# Altium PCB PCBVrBikeV1.PcbDoc
Units mm, origin at the board's own origin, x right, y up, seen from the top; angles counter-clockwise.
Board outline 150 x 40 mm, 2 copper layers (Top Layer, Bottom Layer); 9 components, 16 nets, 82 pads, 0 vias.
Unrouted connection lines stored in the file: 1.
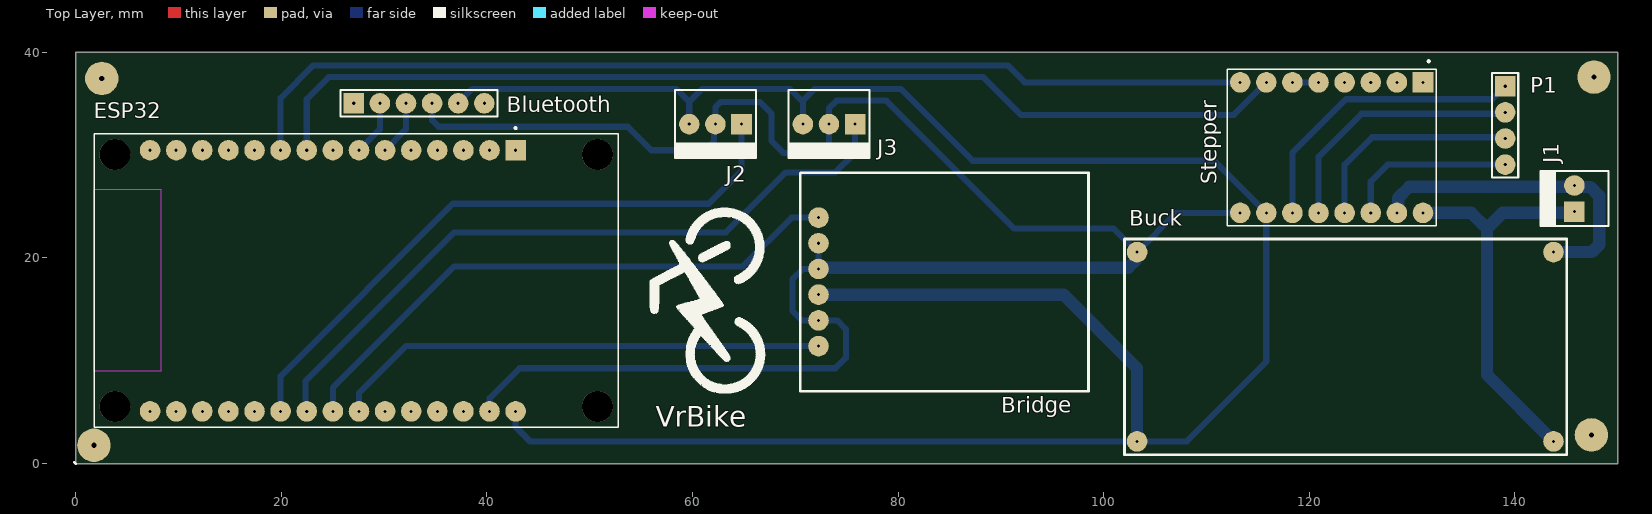
[diagram p0: Top Layer view]
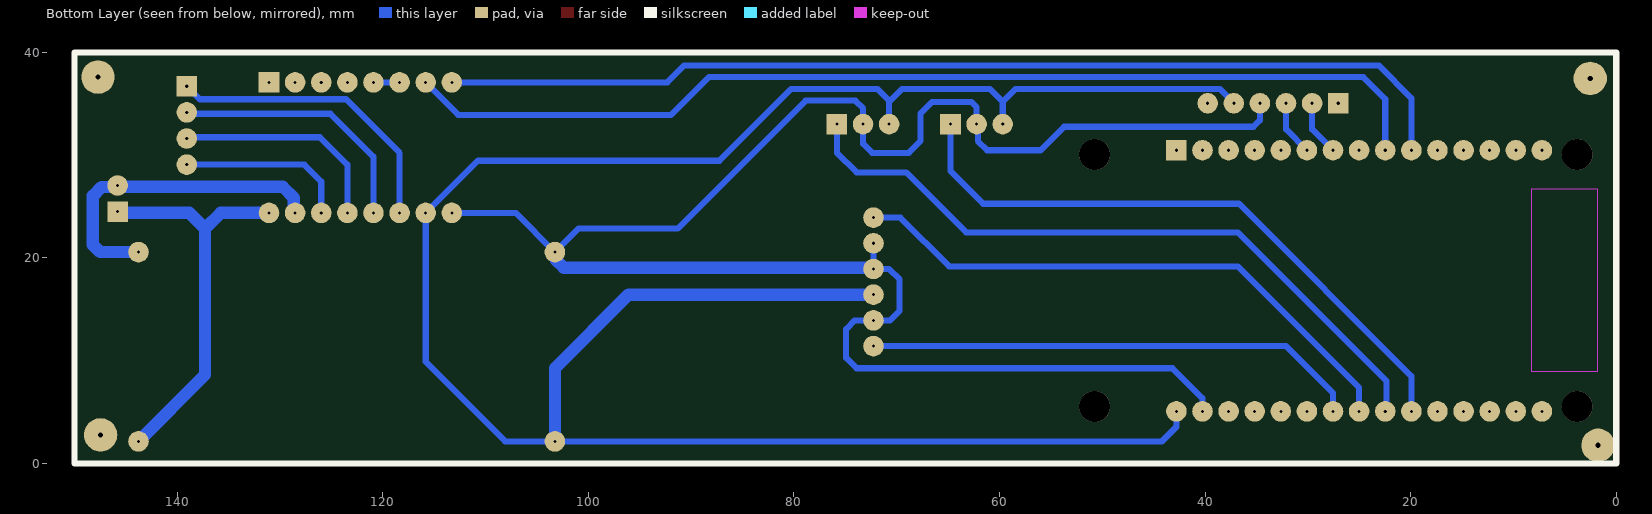
[diagram p1: Bottom Layer view, seen from below]

## Layer stack, top to bottom
Top Solder: solder mask 0.0102, Solder Resist, Dk 3.5
Top Layer: signal copper 0.0356
Dielectric 1: dielectric 0.32, FR-4, Dk 4.8
Bottom Layer: signal copper 0.0356
Bottom Solder: solder mask 0.0102, Solder Resist, Dk 3.5

## Board outline
0,0 0,40 150,40 150,0

## Design rules (kind name [scope] priority, off if disabled: settings)
Clearance [All] p1: gap=0.3 ignorepadtopadclearanceinfootprint=FALSE except(0: Arc-Hole Track-Hole SMDPad-Hole THPad-Hole Via-Hole Fill-Hole Poly-Hole Region-Hole Text-Hole)
DiffPairsRouting [All] p1: maxlimit=0.254 minlimit=0.254 mostfreqgap=0.254 substack1={94633C89-C73B-4681-96DD-338DADF11B5A} toplayer_{94633c89-c73b-4681-96dd-338dadf11b5a}_minwidth=0.381 toplayer_{94633c89-c73b-4681-96dd-338dadf11b5a}_maxwidth=0.381 toplayer_{94633c89-c73b-4681-96dd-338dadf11b5a}_prefwidth=0.381 bottomlayer_{94633c89-c73b-4681-96dd-338dadf11b5a}_minwidth=0.381 bottomlayer_{94633c89-c73b-4681-96dd-338dadf11b5a}_maxwidth=0.381 bottomlayer_{94633c89-c73b-4681-96dd-338dadf11b5a}_prefwidth=0.381 toplayer_minwidth=0.381 toplayer_maxwidth=0.381 toplayer_prefwidth=0.381 bottomlayer_minwidth=0.381 bottomlayer_maxwidth=0.381 bottomlayer_prefwidth=0.381 substack2={862C635F-895E-4511-A5F8-17FF813F69CD} toplayer_{862c635f-895e-4511-a5f8-17ff813f69cd}_minwidth=0.381 toplayer_{862c635f-895e-4511-a5f8-17ff813f69cd}_maxwidth=0.381 toplayer_{862c635f-895e-4511-a5f8-17ff813f69cd}_prefwidth=0.381 bottomlayer_{862c635f-895e-4511-a5f8-17ff813f69cd}_minwidth=0.381 bottomlayer_{862c635f-895e-4511-a5f8-17ff813f69cd}_maxwidth=0.381 bottomlayer_{862c635f-895e-4511-a5f8-17ff813f69cd}_prefwidth=0.381 maxuncoupledlength=12.7
PolygonConnect [All] p1: connectstyle=Relief reliefconductorwidth=0.254 reliefentries=4 polygonreliefangle="90 Angle" airgapwidth=0.254
RoutingVias [All] p1: holewidth=0.3 width=2 viastyle="Through Hole" minholewidth=0.3 minwidth=2 maxholewidth=0.3 maxwidth=2
SolderMaskExpansion [All] p1: expansion=0.102 istentingtop=FALSE
Width [All] p1: maxlimit=1.4 minlimit=0.6 preferedwidth=0.6 substack1={94633C89-C73B-4681-96DD-338DADF11B5A} toplayer_{94633c89-c73b-4681-96dd-338dadf11b5a}_minwidth=0.254 bottomlayer_{94633c89-c73b-4681-96dd-338dadf11b5a}_minwidth=0.254 substack2={862C635F-895E-4511-A5F8-17FF813F69CD} toplayer_{862c635f-895e-4511-a5f8-17ff813f69cd}_minwidth=0.254 bottomlayer_{862c635f-895e-4511-a5f8-17ff813f69cd}_minwidth=0.254 minimp=50.000000 maximp=50.000000 favimp=50.000000
29 further rules are at their usual default settings.

## Components (designator, comment, footprint, x,y, rotation, side; value= is the part's Value field where it differs from the comment)
Bluetooth "BT Module" HDR1X6 27.051,35.052 r0 top (schematic designator P?)
Bridge "Doble puente H" "Vibration Driver" 98.552,28.368 r270 top
Buck "Buck Converter" "Buck Converter Modulo" 145.034,21.844 r270 top (schematic designator BUCK)
ESP32 "ESP32-DEVKIT-V1" MODULE_ESP32_DEVKIT_V1 27.284,17.78 r270 top (schematic designator U?)
J1 "MOLEX2" MOLEX2 145.796,24.511 r90 top
J2 "MOLEX3" MOLEX3 64.77,33.02 r180 top
J3 "MOLEX3" MOLEX3 75.819,33.02 r180 top
P1 "Header 4" HDR1X4 139.065,36.703 r270 top
Stepper "A4988_STEPPER_MOTOR_DRIVER_CARRIER" MODULE_A4988_STEPPER_MOTOR_DRIVER_CARRIER 122.174,30.734 r270 top (schematic designator U)

## Footprints (in the part's own frame and the unit in brackets; to place one, negate y for a bottom-side part, rotate by r counter-clockwise, add the part's x,y. Pads: shape width x height; smd on the part's side, far side on the other; paste and mask are expansions set on the pad)
"Buck Converter Modulo" [mm] "modulo entero de conversor Buck"
  round 2 hole 0.3: 1(1.27,-1.27) 2(19.685,-1.27) 3(1.27,-41.783) 4(19.685,-41.783)
  silkscreen extent 0,-43 21,0
HDR1X4 [mm] "Connector; Header; 4 Position"
  rect 2x2 hole 0.3: 1(0,0)
  round 2 hole 0.3: 2(2.54,0) 3(5.08,0) 4(7.62,0)
  silkscreen extent -1.27,-1.27 8.89,1.27
HDR1X6 [mm] "Connector; Header; 6 Position"
  rect 2x2 hole 0.3: 1(0,0)
  round 2 hole 0.3: 2(2.54,0) 3(5.08,0) 4(7.62,0) 5(10.16,0) 6(12.7,0)
  silkscreen extent -1.27,-1.27 13.97,1.27
MODULE_A4988_STEPPER_MOTOR_DRIVER_CARRIER [mm]
  rect 2x2 hole 0.3: 1(-6.35,8.89)
  round 2 hole 0.3: 2(-6.35,6.35) 3(-6.35,3.81) 4(-6.35,1.27) 5(-6.35,-1.27) 6(-6.35,-3.81) 7(-6.35,-6.35) 8(-6.35,-8.89) 9(6.35,-8.89) 10(6.35,-6.35) 11(6.35,-3.81) 12(6.35,-1.27) 13(6.35,1.27) 14(6.35,3.81) 15(6.35,6.35) 16(6.35,8.89)
  silkscreen extent -8.5,-10.16 7.62,10.16
MODULE_ESP32_DEVKIT_V1 [mm]
  rect 2x2 hole 0.3: 1(-12.7,15.515)
  round 2 hole 0.3: 2(-12.7,12.975) 3(-12.7,10.435) 4(-12.7,7.895) 5(-12.7,5.355) 6(-12.7,2.815) 7(-12.7,0.275) 8(-12.7,-2.265) 9(-12.7,-4.805) 10(-12.7,-7.345) 11(-12.7,-9.885) 12(-12.7,-12.425) 13(-12.7,-14.965) 14(-12.7,-17.505) 15(-12.7,-20.045) 16(12.7,-20.045) 17(12.7,-17.505) 18(12.7,-14.965) 19(12.7,-12.425) 20(12.7,-9.885) 21(12.7,-7.345) 22(12.7,-4.805) 23(12.7,-2.265) 24(12.7,0.275) 25(12.7,2.815) 26(12.7,5.355) 27(12.7,7.895) 28(12.7,10.435) 29(12.7,12.975) 30(12.7,15.515)
  round 3 hole 3 unplated: ""(-12.28,23.475) ""(-12.28,-23.475) ""(12.23,23.475) ""(12.23,-23.475)
  Keep-Out Layer region: 8.78,-25.475 -8.91,-25.475 -8.91,-18.985 8.78,-18.985
  Keep-Out Layer region: 8.78,-25.475 -8.91,-25.475 -8.91,-18.985 8.78,-18.985
  Keep-Out Layer region: 8.78,-25.475 -8.91,-25.475 -8.91,-18.985 8.78,-18.985
  silkscreen extent -14.95,-25.48 14.23,25.48
MOLEX2 [mm]
  rect 2x2 hole 0.3: 1(0,0)
  round 2 hole 0.3: 2(2.54,0)
  silkscreen extent -1.4,-3.3 3.94,3.3, body extent -1.27,-3.17 3.81,3.18, height 10.74
MOLEX3 [mm]
  rect 2x2 hole 0.3: 1(0,0)
  round 2 hole 0.3: 2(2.54,0) 3(5.08,0)
  silkscreen extent -1.4,-3.3 6.48,3.3, body extent -1.27,-3.17 6.35,3.18, height 10.74
"Vibration Driver" [mm] "Doble puente H para motores de vibracion"
  round 2 hole 0.3: 1(4.438,-26.289) 2(6.938,-26.289) 3(9.438,-26.289) 4(11.938,-26.289) 5(14.438,-26.289) 6(16.938,-26.289)
  silkscreen extent 0.08,-28.07 21.34,-0.02

## Part data
Bluetooth: library part "Header 6", "Header, 6-Pin", LatestRevisionDate=17-Jul-2002, LatestRevisionNote="Re-released for DXP Platform.", Publisher="Altium Limited"
Bridge: library part Component_1, "Modulo Doble puente H motores vibración"
Buck: library part Component_1, "Buck Converter module"
ESP32: "Dual core, Wi-Fi: 2.4 GHz up to 150 Mbits/s,BLE (Bluetooth Low Energy) and legacy Bluetooth, 32 bits, Up to 240 MHz", Package=None, Availability="Not in stock", Check_prices=https://www.snapeda.com/parts/ESP32-DEVKIT-V1/Do+it/view-part/?ref=eda, MF="Do it", MP=ESP32-DEVKIT-V1, Price=None, SnapEDA_Link=https://www.snapeda.com/parts/ESP32-DEVKIT-V1/Do+it/view-part/?ref=snap
P1: "Header, 4-Pin", LatestRevisionDate=17-Jul-2002, LatestRevisionNote="Re-released for DXP Platform.", Publisher="Altium Limited"
Stepper: "Stepper Motor Driver", Package=None, Availability=Unavailable, MF=Pololu, MP="A4988 STEPPER MOTOR DRIVER CARRIER", Price=None, SnapEDA_Link=https://www.snapeda.com/parts/A4988%20STEPPER%20MOTOR%20DRIVER%20CARRIER/Pololu/view-part/1499394/?ref=snap

## Free pads (board coordinates)
  round 3.25 hole 0.5: 10(2.54,37.465) 11(1.778,1.778) 12(147.447,2.794) 13(147.701,37.592)

## Nets (pads, with @x,y where several pads share a name; then routed paths per layer and width w, separated by ;. In a path a pad name is that pad's centre, name@x,y a point inside that pad or via, vN(x,y) a via of type N, cw(c..) or ccw(c..) an arc to the next point about the centre after c; other vN are vias at no path point)
1A: P1.2 Stepper.12 | length 25.4
  Bottom Layer w0.6: Stepper.12 120.904,29.845 125.095,34.036 138.938,34.036 P1.2
1B: P1.1 Stepper.11 | length 29.2
  Bottom Layer w0.6: Stepper.11 118.364,30.226 123.571,35.433 137.795,35.433 P1.1
3V3: Bluetooth.5 Bridge.4 Buck.4 ESP32.30 J2.3 J3.3 Stepper.10 | length 224.6
  Bottom Layer w0.6: Bluetooth.5 38.597,36.438 58.431,36.438 59.69,35.179 ; ESP32.30 42.799,3.556 44.196,2.159 Buck.4 108.077,2.159 115.824,9.906 Stepper.10 110.744,29.464 87.249,29.464 80.264,36.449 71.882,36.449 70.739,35.306 J3.3 ; J2.3 59.69,35.179 ; 70.739,35.179 69.469,36.449 60.96,36.449 59.69,35.179
  Bottom Layer w1.2: Bridge.4 96.092,16.43 103.251,9.271 Buck.4
12V: Buck.2 J1.1 Stepper.16 | length 39.4
  Bottom Layer w1.2: Stepper.16 135.763,24.384 137.287,22.86 ; Buck.2 137.287,8.636 137.287,22.86 ; J1.1 145.669,24.384 138.811,24.384 137.287,22.86
GND: Bluetooth.4 Bridge.2 Bridge.3 Bridge.5 Buck.1 Buck.3 ESP32.29 J1.2 J2.2 J3.2 Stepper.9 Stepper.15 | length 219.1
  Top Layer w1.2: Stepper.15 Stepper.15@128.613,24.384
  Bottom Layer w0.6: Bluetooth.4 34.671,33.401 35.306,32.766 53.721,32.766 56.007,30.48 61.214,30.48 62.103,31.369 62.103,32.893 J2.2 62.23,34.671 62.738,35.179 66.548,35.179 67.691,34.036 67.691,31.369 68.834,30.226 72.39,30.226 73.279,31.115 J3.2 73.279,34.544 74.041,35.306 78.867,35.306 91.313,22.86 100.965,22.86 Buck.3 107.061,24.384 Stepper.9 ; ESP32.29 40.259,6.35 43.18,9.271 73.914,9.271 74.93,10.287 74.93,13.081 74.081,13.93 Bridge.5 70.652,13.93 69.723,14.859 69.723,17.907 70.739,18.923 72.256,18.923 Bridge.3 Bridge.2 ; Stepper.15 Stepper.15@128.646,24.506 ; J1.2@145.669,26.924 J1.2
  Bottom Layer w1.2: Bridge.3 72.383,19.05 102.386,19.05 103.189,19.853 103.189,20.512 Buck.3 ; Stepper.15@128.646,24.506 128.646,25.84 129.73,26.924 J1.2@145.669,26.924 ; Buck.1 147.497,20.574 148.2,21.277 148.2,26.044 147.346,26.898 145.949,26.898 J1.2
MV1: Bridge.1 ESP32.23 | length 56.4
  Bottom Layer w0.6: ESP32.23 25.019,7.366 36.83,19.177 64.897,19.177 69.65,23.93 Bridge.1
MV2: Bridge.6 ESP32.24 | length 48.4
  Bottom Layer w0.6: ESP32.24 27.559,6.858 32.131,11.43 Bridge.6
NetP1_3: P1.3 Stepper.13 | length 21.5
  Bottom Layer w0.6: Stepper.13 123.444,29.083 126.111,31.75 138.938,31.75 P1.3
NetP1_4: P1.4 Stepper.14 | length 16.8
  Bottom Layer w0.6: Stepper.14 125.984,27.432 127.635,29.083 P1.4
NetU_5: Stepper.5 Stepper.6 | length 2.5
  Bottom Layer w0.6: Stepper.6 Stepper.5
RXD: Bluetooth.2 ESP32.7 | length 5.4
  Bottom Layer w0.6: ESP32.7 29.591,32.512 Bluetooth.2
ST1: ESP32.10 Stepper.8 | length 100.4
  Bottom Layer w0.6: ESP32.10 19.939,35.56 23.114,38.735 90.678,38.735 92.329,37.084 Stepper.8
ST2: ESP32.9 Stepper.7 | length 102
  Bottom Layer w0.6: ESP32.9 22.479,35.462 24.609,37.592 88.265,37.592 91.948,33.909 112.649,33.909 Stepper.7
SV1: ESP32.21 J2.1 | length 61.1
  Bottom Layer w0.6: ESP32.21 19.939,8.509 36.703,25.273 61.595,25.273 64.77,28.448 J2.1
SV2: ESP32.22 J3.1 | length 69.1
  Bottom Layer w0.6: ESP32.22 22.352,5.207 22.352,8.001 36.83,22.479 63.246,22.479 69.088,28.321 73.914,28.321 75.819,30.226 J3.1 J3.1@75.369,32.57
TXD: Bluetooth.3 ESP32.6 | length 5.5
  Bottom Layer w0.6: ESP32.6 32.131,32.512 Bluetooth.3 ; Bluetooth.3@31.877,34.798 Bluetooth.3@32.004,34.798
pads on no net: Bluetooth.1 Bluetooth.6 ESP32. ESP32.1 ESP32.2 ESP32.3 ESP32.4 ESP32.5 ESP32.8 ESP32.11 ESP32.12 ESP32.13 ESP32.14 ESP32.15 ESP32.16 ESP32.17 ESP32.18 ESP32.19 ESP32.20 ESP32.25 ESP32.26 ESP32.27 ESP32.28 Stepper.1 Stepper.2 Stepper.3 Stepper.4
copper on no net: | length 1
  Top Layer w0.6: 146.858,2.54 146.939,2.459 146.939,2.286 147.447,2.794

## Silkscreen, mask and mechanical layers (free items; w line width, h text height)
Top Overlay:
  drawing of 4 lines, arcs and shapes, not listed
  text "VrBike" at 56.434,3.602 h2
Bottom Overlay:
  the board outline again, w0.6